# Altium PCB SM_ME0005V2.6_20161210.PcbDoc (part 2 of 3)
Units mil, origin at the board's own origin, x right, y up, seen from the top; angles counter-clockwise.
Board outline 2285 x 3470 mil, 2 copper layers (Top Layer, Bottom Layer); 87 components, 70 nets, 269 pads, 297 vias.
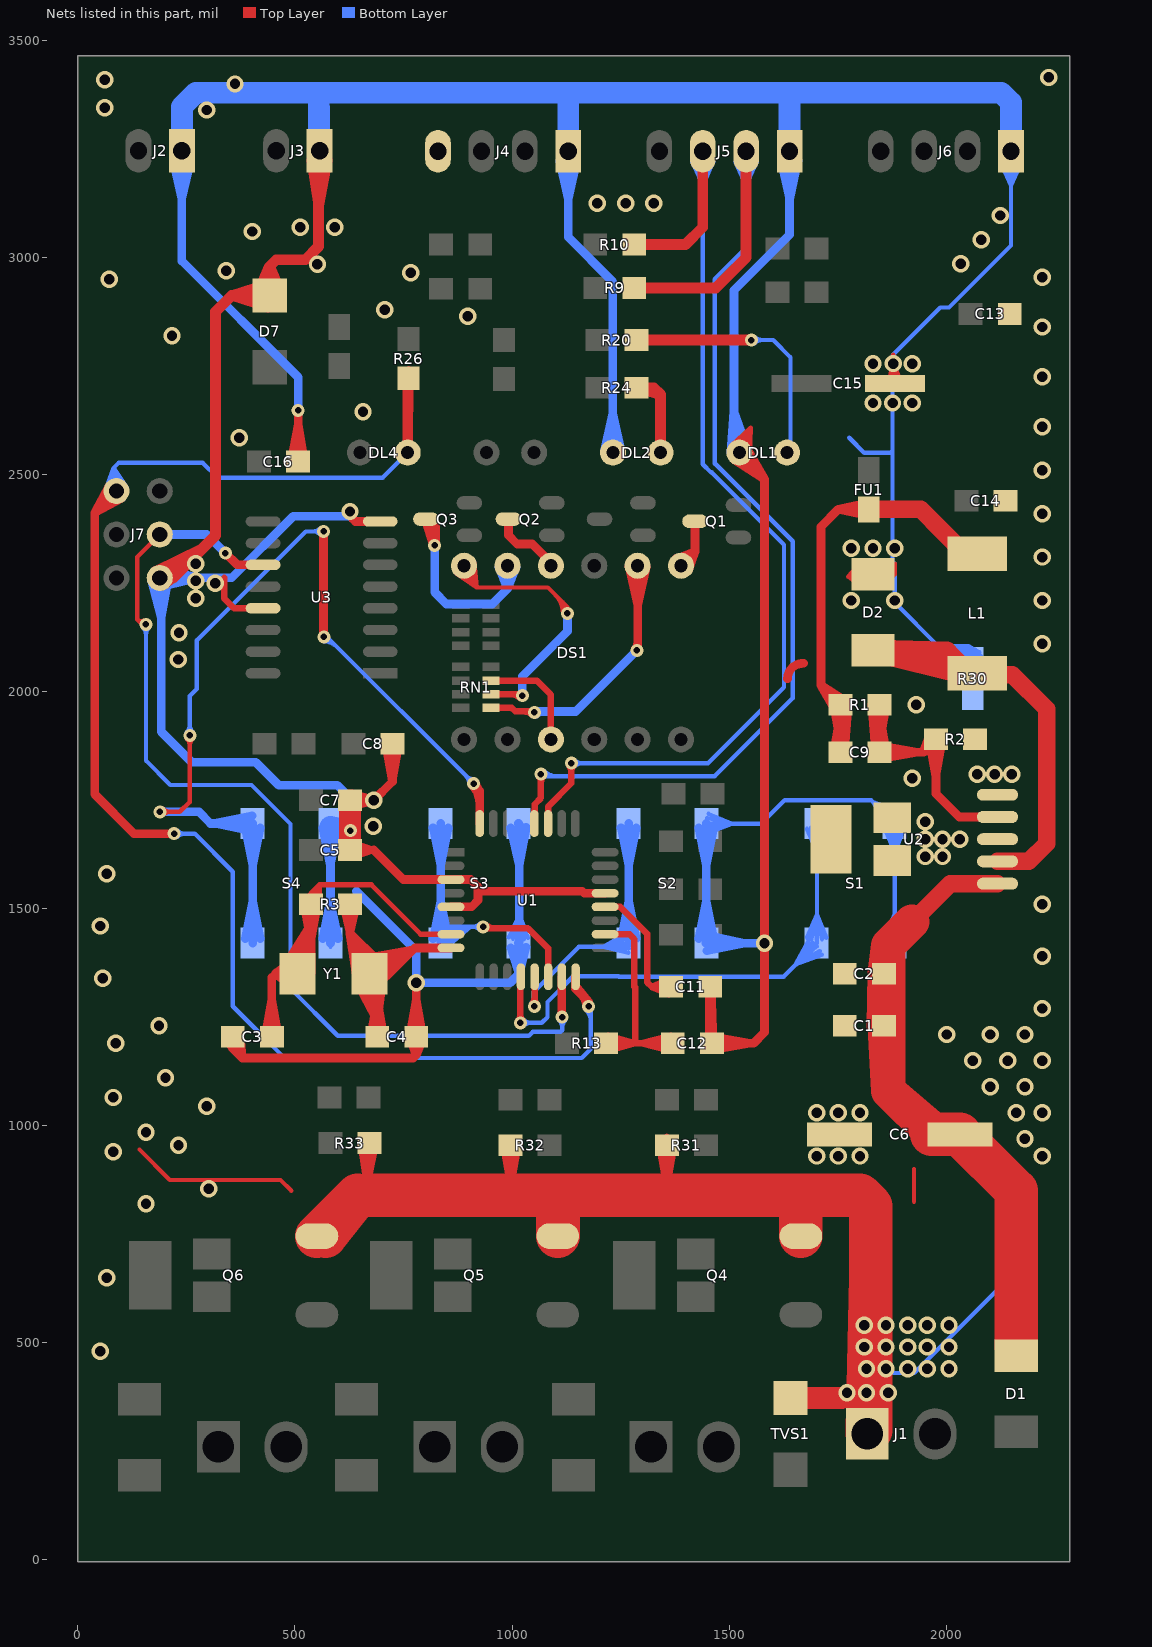
[diagram p2: the nets of this part, all layers, seen from the top]

## Via types
v1: diameter 40, hole 24, Top Layer to Bottom Layer, 247 vias
v2: diameter 30, hole 15, Top Layer to Bottom Layer, 50 vias

## Nets (pads, with @x,y where several pads share a name; then routed paths per layer and width w, separated by ;. In a path a pad name is that pad's centre, name@x,y a point inside that pad or via, vN(x,y) a via of type N, cw(c..) or ccw(c..) an arc to the next point about the centre after c; other vN are vias at no path point) (continued)
GND: C3.1 C4.1 C5.1 C7.1 C8.1 C11.2 C12.1 C13.2 C14.2 C15.2 C16.1 D2.A D7.1 DL1.K DL2.K J2.1 J3.1 J4.1 J4.4 J5.1 J6.1 J7.6 R30.2@2061.73,2074.57 S1.1 S2.1 S3.1 S4.1 U1.3 U1.5 U1.21 U3.8 U3.13 | length 27880.1
  Top Layer w10: U3.13@423.49,2194.57 U3.13@426.49,2191.57 ; v2@497.49,2647.57 v2@506.73,2638.32 ; 1161.73,1539.57 1166.22,1535.08 ; C12.1@1445.4,1189.57 C12.1@1460.4,1189.57 ; DL1.K@1503.47,2564.83 1549.73,2607.57 ; DL1.K@1510.91,2557.97 1549.73,2607.57 ; DL1.K@1519.8,2550.2 1519.8,2577.64 1549.73,2607.57 ; DL1.K@1523.74,2550.2 1549.73,2607.57 ; DL1.K@1538.04,2545.68 1549.73,2607.57 ; DL1.K@1548.1,2544.6 1549.73,2607.57 ; C15.2@1827.49,2709.57 C15.2@1877.98,2709.57 ; C15.2@1867.62,2710.47 v1@1877.98,2759.48 ; C15.2@1867.62,2710.55 v1(1877.98,2755.38) ; 1877.98,2775.82 C15.2@1877.98,2709.57 ; 1881.73,2294.57 1881.73,2269.57 D2.A@1876.73,2264.57 ; C15.2@1896.49,2713.25 v1(1877.98,2755.38) ; C15.2@1896.56,2712.95 v1@1877.98,2759.48 ; 1774.49,2264.57 1819.23,2269.57 1774.49,2264.57 ; 1774.49,2264.57 1816.13,2281.68 1774.49,2264.57 ; 1774.49,2264.57 1818.88,2257.07 1774.49,2264.57 ; 1774.49,2264.57 1811.23,2290.59 1774.49,2264.57 ; 1774.49,2264.57 1816.06,2247.29 1774.49,2264.57 ; 1774.49,2264.57 1804.21,2298.39 1774.49,2264.57 ; 1774.49,2264.57 1810.94,2238.14 1774.49,2264.57 ; 1774.49,2264.57 D2.A@1876.73,2264.57 ; 1774.49,2264.57 D2.A@1876.73,2264.57 ; C15.2@1877.98,2709.57 v1(1877.98,2755.38) ; v1(1877.98,2755.38) C15.2@1882.28,2709.57 v1@1877.98,2759.48
  Top Layer w15: 336.73,2261.57 336.73,2214.57 359.73,2191.57 ; U3.13@398.49,2191.57 359.73,2191.57 ; U3.13@426.49,2191.57 359.73,2191.57 ; C5.1@626.73,1634.57 681.73,1634.57 ; C5.1@629.23,1634.57 681.73,1634.57 ; C5.1@632.15,1617.31 681.73,1634.57 ; C5.1@632.15,1651.82 681.73,1634.57
  Top Layer w20: C3.1@346.2,1197.15 378.49,1155.57 ; C3.1@359.23,1204.57 378.49,1155.57 ; C3.1@373.83,1208.01 378.49,1155.57 ; C16.1@491.8,2531.02 507.49,2614.57 ; v2(507.49,2647.57) 507.49,2530.32 C16.1@506.73,2529.57 507.49,2614.57 ; C16.1@521.68,2530.76 507.49,2614.57 ; C5.1@626.73,1634.57 C5.1@631.73,1629.57 ; C7.1@626.73,1749.57 v1(681.73,1749.57) ; C7.1@629.23,1749.57 v1(681.73,1749.57) ; C7.1@631.37,1734.72 v1(681.73,1749.57) ; C7.1@631.37,1764.41 v1(681.73,1749.57) ; v1@631.99,2399.07 639.49,2391.57 ; U3.8@668.49,2391.57 639.49,2391.57 ; 681.73,1634.57 749.72,1566.57 U1.3@859.49,1566.57 904.72,1566.57 ; U3.8@696.49,2391.57 639.49,2391.57 ; C8.1@709.55,1878.24 724.49,1794.57 C8.1@739.43,1878.24 ; C8.1@724.49,1879.57 724.49,1792.32 v1(681.73,1749.57) ; C4.1@764.55,1205.4 779.49,1289.08 C4.1@794.43,1205.4 ; C4.1@764.73,1201.39 779.49,1162.32 ; 768.49,1566.57 U1.3@838.33,1566.57 ; v1(779.49,1328.57) C4.1@779.49,1204.08 779.49,1162.32 ; C4.1@794.24,1201.39 779.49,1162.32 ; U1.5@859.49,1503.58 906.73,1503.58 ; U1.5@880.65,1503.58 906.73,1503.58 ; U1.3@880.65,1566.57 904.72,1566.57 ; 1161.73,1539.57 921.73,1539.57 ; U1.21@1193.33,1535.08 1166.22,1535.08 U1.21@1214.49,1535.08 ; C12.1@1460.4,1189.57 1556.73,1189.57 1581.73,1214.57 v1(1581.73,1419.57) 1581.73,2488.27 ; C12.1@1462.9,1189.57 1547.9,1189.57 ; C12.1@1464.22,1174.62 1547.9,1189.57 ; C12.1@1464.22,1204.51 1547.9,1189.57 ; 1634.73,2029.57 cw(c1670.73,2028.57) 1671.73,2064.57 ; 356.73,1177.32 C3.1@356.73,1204.57 ; 356.73,1177.32 342.31,1200.44 356.73,1177.32 ; 356.73,1177.32 371.15,1200.44 356.73,1177.32 ; 356.73,1177.32 C3.1@356.73,1204.57 ; 356.73,1177.32 C3.1@356.73,1204.57 ; 356.73,1177.32 378.49,1155.57 ; 378.49,1155.57 772.73,1155.57 779.49,1162.32 ; 904.72,1566.57 921.73,1549.57 921.73,1539.57 ; 906.73,1503.58 921.73,1518.58 921.73,1539.57 ; 1581.73,2488.27 DL1.K@1523.74,2550.2 1581.73,2488.27 ; 1581.73,2488.27 1510.85,2534.9 1581.73,2488.27 ; 1581.73,2488.27 1539.85,2562.05 1581.73,2488.27 ; 1581.73,2488.27 1519.8,2550.2 1581.73,2488.27
  Top Layer w25: J7.6@179.66,2276.68 285.53,2328.36 ; J7.6@199.45,2247.93 285.53,2328.36 ; D7.1@415.4,2917.61 441.73,2979.57 ; D7.1@437.6,2885.69 354.41,2912.24 ; D7.1@437.6,2938.79 354.41,2912.24 ; D7.1@468.06,2917.61 441.73,2979.57 ; J3.1@539.27,3224.48 554.49,3120.54 ; J3.1@554.49,3254.57 554.49,3025 524.05,2994.57 456.73,2994.57 441.73,2979.57 ; J3.1@556.73,3225.57 554.49,3120.54 ; J3.1@574.14,3223.74 554.49,3120.54 ; 1459.3,1219.55 C11.2@1456.73,1319.57 ; J7.6@188.49,2261.57 218.73,2261.57 ; J7.6@188.49,2261.57 285.53,2328.36 ; J7.6@188.49,2261.57 218.73,2261.57 ; 218.73,2261.57 193.55,2244.81 218.73,2261.57 ; 218.73,2261.57 193.55,2278.32 218.73,2261.57 ; 218.73,2261.57 316.73,2359.57 316.73,2874.57 354.41,2912.24 ; 354.41,2912.24 D7.1@441.73,2912.24 ; 354.41,2912.24 D7.1@441.73,2912.24 ; D7.1@441.73,2912.24 441.73,2979.57 ; C11.2@1456.73,1319.57 1456.73,1289.77 C12.1@1460.4,1189.57 1456.73,1193.23 C11.2@1456.73,1319.57
  Top Layer w50: C5.1@626.73,1634.57 C7.1@626.73,1749.57
  Bottom Layer w10: v2@497.49,2647.57 v2@506.73,2656.81 ; S4.1@581.73,1411.57 S4.1@581.73,1419.57 ; S3.1@992.81,1433.32 1016.73,1485.74 ; S3.1@992.8,1682.82 1016.73,1630.39 ; S3.1@1002.33,1429.94 1016.73,1485.74 ; S3.1@1002.33,1686.2 1016.73,1630.39 ; S3.1@1014.76,1428.15 1016.73,1485.74 ; S3.1@1014.76,1687.99 1016.73,1630.39 ; S3.1@1016.73,1422.24 1016.73,1409.57 S3.1@1016.73,1695.16 ; S3.1@1027.29,1429.09 1016.73,1485.74 ; S3.1@1027.29,1687.05 1016.73,1630.39 ; S3.1@1037.02,1431.81 1016.73,1485.74 ; S3.1@1037.02,1684.34 1016.73,1630.39 ; 1126.73,3379.57 1129.49,3376.81 1129.49,3369.57 ; 1232.4,3369.57 1232.4,3375.23 1236.73,3379.57 ; S2.1@1446.73,1419.57 S2.1@1446.73,1420.27 ; S2.1@1446.73,1695.16 1447.83,1695.16 1573.89,1695.16 1628.3,1749.57 1827.32,1749.57 1881.73,1695.16 S1.1@1881.73,1419.57 ; S2.1@1447.83,1695.87 1505.4,1695.16 ; S2.1@1449.05,1683.37 1505.4,1695.16 ; S2.1@1449.36,1708.33 1505.4,1695.16 ; S2.1@1451.98,1673.69 1505.4,1695.16 ; S2.1@1452.53,1717.93 1505.4,1695.16 ; 1776.73,2584.57 1811.73,2549.57 1871.73,2549.57 1876.73,2554.57 ; S1.1@1858.85,1432.88 1881.73,1485.71 ; S1.1@1858.85,1683.26 1881.73,1630.43 ; S1.1@1863.56,1689.32 1832.16,1744.73 ; S1.1@1868.44,1429.7 1881.73,1485.71 ; S1.1@1868.44,1686.44 1881.73,1630.43 ; S1.1@1871.91,1694.97 1832.16,1744.73 ; S1.1@1880.91,1428.15 1881.73,1485.71 ; S1.1@1880.91,1687.99 1881.73,1630.43 ; S1.1@1880.91,1703.74 1832.16,1744.73 ; S1.1@1888,1714.1 1832.16,1744.73 ; S1.1@1892.14,1723.3 1832.16,1744.73 ; S1.1@1893.41,1429.34 1881.73,1485.71 ; S1.1@1893.41,1686.8 1881.73,1630.43 ; S1.1@1903.09,1432.25 1881.73,1485.71 ; S1.1@1903.09,1683.89 1881.73,1630.43 ; R30.2@2051.07,2060.14 1999.32,2104.57 ; R30.2@2057.04,2068.24 1999.32,2104.57 ; R30.2@2058.13,2052.39 2101.73,2054.57 ; R30.2@2058.8,2062.51 2101.73,2054.57 ; R30.2@2061.73,2072.07 2101.73,2054.57 ; R30.2@2065.08,2086.49 1999.32,2104.57 ; R30.2@2066.76,2080.71 2101.73,2054.57 ; R30.2@2067.03,2096.35 1999.32,2104.57 ; R30.2@2073.73,2088.07 2101.73,2054.57 ; J6.1@2125.49,3219.83 2149.49,3165.35 ; J6.1@2135.07,3223.11 2149.49,3165.35 ; J6.1@2149.49,3224.88 2149.49,3165.35 ; J6.1@2149.49,3244.57 2149.49,3027.32 2006.73,2884.57 1986.73,2884.57 1876.73,2774.57 1876.73,2554.57 ; J6.1@2163.91,3223.11 2149.49,3165.35 ; J6.1@2173.49,3219.83 2149.49,3165.35 ; 1876.73,2554.57 1876.73,2299.57 1881.73,2294.57 1881.73,2204.57 1981.73,2104.57 2051.73,2104.57 ; 1999.32,2104.57 R30.2@2061.73,2077.07 ; 2051.73,2104.57 R30.2@2061.73,2077.07 ; 2051.73,2104.57 2070.41,2082.04 2051.73,2104.57 ; 2051.73,2104.57 2051.89,2075.3 2051.73,2104.57 ; 2051.73,2104.57 2077.06,2089.91 2051.73,2104.57 ; 2051.73,2104.57 2041.73,2077.07 2051.73,2104.57 ; 2051.73,2104.57 R30.2@2061.73,2077.07 ; 2051.73,2104.57 2101.73,2054.57 ; 2099.01,2057.29 ccw(c2104.69,2062.96) 2106.67,2055.18 cw(c2104.69,2062.96) 2099.01,2057.29
  Bottom Layer w20: J7.6@168.7,2258.64 191.73,2171.4 ; J7.6@190.71,2241.69 278.49,2261.57 J7.6@190.71,2281.44 ; J7.6@208.43,2260.07 191.73,2171.4 ; J2.1@219.61,3223.34 239.49,3135.57 ; J2.1@239.49,3225.57 239.49,3135.57 ; J2.1@239.49,3254.57 239.49,2991.81 507.49,2723.81 v2(507.49,2647.57) ; J2.1@259.36,3223.34 239.49,3135.57 ; S4.1@564.22,1429.92 581.73,1515.71 ; S4.1@564.22,1686.22 581.73,1600.43 ; S4.1@581.69,1428.15 581.73,1515.71 ; S4.1@581.69,1687.99 581.73,1600.43 ; S4.1@581.73,1419.57 S4.1@581.73,1679.57 ; S4.1@599.16,1429.9 581.73,1515.71 ; S4.1@599.16,1686.24 581.73,1600.43 ; v2@623.95,1683.1 ccw(c593.1,1713.95) 636.73,1713.95 ; v2@631.73,1684.57 636.73,1689.57 636.73,1744.57 597.73,1783.57 462.73,1783.57 409.73,1836.57 262.23,1836.57 191.73,1907.07 191.73,2258.32 J7.6@188.49,2261.57 ; v1@631.99,2399.07 627.49,2403.57 495.73,2403.57 353.73,2261.57 336.73,2261.57 J7.6@188.49,2261.57 ; 641.73,1539.57 779.49,1401.81 v1(779.49,1328.57) 995.73,1328.57 1016.73,1349.57 ; S3.1@997.34,1685.84 1016.73,1600.39 ; S3.1@997.46,1409.4 1016.73,1349.57 ; S3.1@1014.76,1412.4 1016.73,1349.57 ; S3.1@1014.76,1420.27 1016.73,1422.24 1016.73,1693.9 S3.1@1014.76,1695.87 ; S3.1@1014.76,1687.99 1016.73,1600.39 ; S3.1@1016.73,1409.57 1016.73,1349.57 ; S3.1@1032.22,1410.49 1016.73,1349.57 ; S3.1@1032.27,1686.63 1016.73,1600.39 ; J4.1@1110.08,3222.75 1129.49,3135.35 ; J4.1@1129.49,3224.88 1129.49,3135.35 ; J4.1@1129.49,3244.57 1129.49,3046.81 1232.4,2943.9 DL2.K@1232.4,2550.2 ; J4.1@1148.9,3222.75 1129.49,3135.35 ; DL2.K@1212.52,2552.42 1232.4,2640.2 DL2.K@1252.28,2552.42 ; S2.1@1430.36,1429.91 1447.83,1515.71 ; S2.1@1430.36,1686.23 1447.83,1600.43 ; S2.1@1446.73,1419.57 v1(1581.73,1419.57) ; S2.1@1447.83,1428.15 1447.83,1515.71 ; S2.1@1447.83,1687.99 1447.83,1600.43 ; S2.1@1447.83,1695.87 1447.83,1695.16 S2.1@1447.83,1420.27 1535.4,1419.57 ; S2.1@1449.45,1402.79 1535.4,1419.57 ; S2.1@1449.74,1437.73 1535.4,1419.57 ; S2.1@1465.3,1429.91 1447.83,1515.71 ; S2.1@1465.3,1686.23 1447.83,1600.43 ; DL1.K@1503.74,2549.73 1511.55,2644.59 ; DL1.K@1506.73,2563.27 DL1.K@1519.8,2550.2 ; DL1.K@1511.55,2568.08 1511.55,2924.38 1639.49,3052.32 J5.1@1639.49,3244.57 ; DL1.K@1523.74,2550.2 1511.55,2644.59 ; DL1.K@1543.19,2554.83 1511.55,2644.59 ; J5.1@1620.08,3222.75 1639.49,3135.35 ; J5.1@1639.49,3224.88 1639.49,3135.35 ; J5.1@1658.9,3222.75 1639.49,3135.35 ; J7.6@188.49,2261.57 191.73,2171.4
  Bottom Layer w50: J2.1@239.49,3254.57 239.49,3347.32 ; J2.1@239.49,3265.57 239.49,3347.32 ; J3.1@554.49,3254.57 554.49,3377.32 ; J3.1@556.73,3265.57 554.49,3377.32 ; S4.1@581.69,1687.99 v2(627.49,1679.57) S4.1@597.32,1679.57 ; J4.1@1129.49,3244.57 1129.49,3369.57 J4.1@1129.49,3264.25 ; J5.1@1639.49,3244.57 1639.49,3372.32 ; J5.1@1639.49,3264.25 1639.49,3372.32 ; J6.1@2149.49,3244.57 2149.49,3357.32 ; J6.1@2149.49,3264.25 2149.49,3357.32 ; 239.49,3347.32 271.73,3379.57 556.73,3379.57 ; 554.49,3377.32 556.73,3379.57 ; 556.73,3379.57 1126.73,3379.57 1236.73,3379.57 1646.73,3379.57 ; 1639.49,3372.32 1646.73,3379.57 ; 1646.73,3379.57 2127.24,3379.57 2149.49,3357.32
  other v1: 680.73,1689.57 230.73,2073.57 2221.73,2109.57 232.73,2135.57 1781.73,2209.57 1881.73,2209.57 2221.73,2209.57 271.73,2214.57 316.73,2249.57 271.73,2254.57 271.73,2294.57 2221.73,2309.57 1781.73,2329.57 1831.73,2329.57 1881.73,2329.57 2221.73,2409.57 626.73,2414.57 2221.73,2509.57 371.73,2584.57 2221.73,2609.57 656.73,2644.57 1831.73,2664.57 1876.73,2664.57 1921.73,2664.57 2221.73,2724.57 1831.73,2754.57 1921.73,2754.57 216.73,2819.57 2221.73,2839.57 897.73,2864.57 706.73,2879.57 71.73,2949.57 2221.73,2954.57 766.73,2964.57 341.73,2969.57 551.73,2984.57 2033.73,2985.57 2080.73,3040.57 401.73,3059.57 511.73,3069.57 591.73,3069.57 2124.73,3096.57 1196.73,3124.57 1261.73,3124.57 1326.73,3124.57 296.73,3339.57 61.73,3344.57 361.73,3399.57 61.73,3409.57 2236.73,3414.57
GND1: C1.2 C2.2 C6.2 J1.1 Q4.3 Q5.3 Q6.3 R2.1 R30.1@2061.73,1984.57 R31.1 R32.1 R33.1 TVS1.1 U2.3 U2.5 | length 8555.9
  Top Layer w10: 141.73,944.57 211.73,874.57 ; 491.73,849.57 466.73,874.57 ; 666.73,839.57 666.73,861.3 ; R31.1@1356.73,959.57 R31.1@1356.73,976.81 ; 1665.55,833.38 1671.73,839.57 ; 1926.19,824.57 1926.19,899.57 ; 211.73,874.57 301.73,874.57 466.73,874.57 ; 211.73,874.57 466.73,874.57
  Top Layer w20: 645,839.57 666.73,861.3 ; R32.1@981.79,953.24 996.73,869.57 ; R32.1@996.73,954.57 996.73,869.57 ; R32.1@996.73,959.57 996.73,844.57 1001.73,839.57 ; R32.1@1011.67,953.24 996.73,869.57 ; 1341.73,839.57 1356.73,854.57 R31.1@1356.73,959.57 ; R31.1@1341.79,953.24 1356.73,869.57 ; R31.1@1356.73,954.57 1356.73,869.57 ; R31.1@1371.67,953.24 1356.73,869.57 ; 666.73,861.3 666.73,959.57 666.73,861.3 ; 666.73,874.29 669.23,959.57 666.73,874.29 ; 666.73,874.29 654.26,958.69 666.73,874.29 ; 666.73,874.29 684.13,957.81 666.73,874.29
  Top Layer w50: TVS1.1@1641.73,372.24 1759.41,372.24 TVS1.1@1651.73,372.24
  Top Layer w100: Q6.3@550.55,745.12 645,839.57 Q6.3@570.24,745.12 ; 666.73,839.57 1001.73,839.57 1106.73,839.57 ; Q4.3@1665.55,745.12 1665.55,833.38 ; J1.1@1818.58,289.57 J1.1@1826.73,297.72 ; 1826.73,649.13 J1.1@1818.58,299.41 ; 1106.73,839.57 Q5.3@1105.55,745.12 1106.73,746.3 1106.73,839.57 ; 1106.73,839.57 1341.73,839.57 1671.73,839.57 1801.73,839.57 1826.73,814.57 ; J1.1@1818.58,299.41 v1@1826.73,384.57 ; J1.1@1818.58,299.41 v1@1826.73,384.57 ; J1.1@1818.58,299.41 v1@1826.73,439.57 ; J1.1@1826.73,297.72 v1@1826.73,384.57 ; J1.1@1826.73,297.72 1826.73,814.57 ; v1@1826.73,384.57 v1@1826.73,439.57 ; v1@1826.73,439.57 1826.73,489.57 1826.73,539.57 1826.73,749.57 1826.73,814.57
  Bottom Layer w10: v1@1818.58,378.62 1818.58,299.41 v1@1818.58,378.62 ; v1@1818.58,378.62 1832.74,300.68 v1@1818.58,378.62 ; v1@1818.58,378.62 1804.43,300.68 v1@1818.58,378.62 ; v1@1818.58,378.62 1842.51,303.11 v1@1818.58,378.62 ; v1@1818.58,378.62 1794.65,303.11 v1@1818.58,378.62 ; v1@1818.58,378.62 1851.99,306.8 v1@1818.58,378.62 ; v1@1818.58,378.62 1785.18,306.8 v1@1818.58,378.62 ; v1@1818.58,378.62 1861.04,311.75 v1@1818.58,378.62 ; v1@1818.58,378.62 1776.13,311.75 v1@1818.58,378.62 ; v1@1818.58,429.57 1818.58,384.57 J1.1@1818.58,289.57 v1@1818.58,429.57 ; v1@1818.58,429.57 1861.73,429.57 1911.73,429.57 v1@1926.73,429.57 ; v1@1818.58,429.57 v1@1926.73,429.57 ; v1@1926.73,429.57 1946.73,449.57 1971.73,474.57 1996.73,499.57 2021.73,524.57 2186.73,689.57 v1@1926.73,429.57
  other v1: 1771.73,384.57 1816.73,384.57 1866.73,384.57 1816.73,439.57 1861.73,439.57 1911.73,439.57 1956.73,439.57 2006.73,439.57 51.73,479.57 1811.73,489.57 1861.73,489.57 1911.73,489.57 1956.73,489.57 2006.73,489.57 1811.73,539.57 1861.73,539.57 1911.73,539.57 1956.73,539.57 2006.73,539.57 66.73,649.57 156.73,819.57 301.73,854.57 1701.73,929.57 1751.73,929.57 1801.73,929.57 2221.73,929.57 81.73,939.57 231.73,954.57 2181.73,969.57 156.73,984.57 1701.73,1029.57 1751.73,1029.57 1801.73,1029.57 2161.73,1029.57 2221.73,1029.57 296.73,1044.57 81.73,1064.57 2101.73,1089.57 2181.73,1089.57 201.73,1109.57 2061.73,1149.57 2141.73,1149.57 2221.73,1149.57 86.73,1189.57 2001.73,1209.57 2101.73,1209.57 2181.73,1209.57 186.73,1229.57 2221.73,1269.57 56.73,1339.57 2221.73,1389.57 51.73,1459.57 2221.73,1509.57 66.73,1579.57 1951.73,1619.57 1991.73,1619.57 1951.73,1659.57 1991.73,1659.57 2031.73,1659.57 1951.73,1699.57 1921.73,1799.57 2071.73,1809.57 2111.73,1809.57 2151.73,1809.57 1931.73,1969.57
IIC_SCL: J5.2 R9.1 U1.28 | length 3156.3
  Top Layer w15: U1.28@1051.52,1695.61 1052.49,1696.58 1052.49,1740.32 ; U1.28@1051.52,1716.77 1052.49,1740.32 ; v2@1061.43,1804.26 cw(c1048.63,1791.46) 1066.73,1791.46 cw(c1084.84,1791.46) v2@1072.04,1804.26 ; v2(1066.73,1809.57) 1066.73,1754.57 1052.49,1740.32
  Top Layer w25: R9.1@1281.73,2929.57 1469.49,2929.57 1539.49,2999.57 J5.2@1539.49,3244.57 ; R9.1@1284.23,2929.57 1384.23,2929.57
  Bottom Layer w10: v2(1066.73,1809.57) 1071.73,1804.57 1466.73,1804.57 1646.73,1984.57 1646.73,2346.13 1468.3,2524.57 1466.73,2524.57 1466.73,2949.92 1539.49,3022.68 J5.2@1539.49,3244.57 ; v2@1073.8,1816.64 ccw(c1102.95,1845.78) 1102.95,1804.57 ; J5.2@1515.49,3219.83 1539.49,3165.35 ; J5.2@1525.07,3223.11 1539.49,3165.35 ; J5.2@1539.49,3224.88 1539.49,3165.35 ; J5.2@1553.91,3223.11 1539.49,3165.35 ; J5.2@1563.49,3219.83 1539.49,3165.35
IIC_SDA: J5.3 R10.1 U1.27 | length 2868.3
  Top Layer w15: U1.27@1083.02,1695.61 1083.02,1734.57 ; U1.27@1083.02,1716.77 1083.02,1734.57 ; v2@1131.43,1829.26 cw(c1118.63,1816.46) 1136.73,1816.46 cw(c1154.84,1816.46) v2@1142.04,1829.26 ; v2(1136.73,1834.57) 1136.73,1788.28 1083.02,1734.57
  Top Layer w25: R10.1@1281.73,3029.57 1399.49,3029.57 1439.49,3069.57 J5.3@1439.49,3244.57 ; R10.1@1284.23,3029.57 1384.23,3029.57
  Bottom Layer w10: v2(1136.73,1834.57) 1451.73,1834.57 1626.73,2009.57 1626.73,2337.85 1460.02,2504.57 1458.45,2504.57 1439.49,2523.53 J5.3@1439.49,3244.57 ; v2@1143.8,1827.49 cw(c1160.87,1810.42) 1160.87,1834.57 cw(c1160.87,1858.71) v2@1143.8,1841.64 ; J5.3@1415.49,3219.83 1439.49,3165.35 ; J5.3@1425.07,3223.11 1439.49,3165.35 ; J5.3@1439.49,3224.88 1439.49,3165.35 ; J5.3@1453.91,3223.11 1439.49,3165.35 ; J5.3@1463.49,3219.83 1439.49,3165.35
KEY1: S1.2 U1.12 | length 3408.3
  Top Layer w10: v2@1021.99,1239.07 1024.49,1236.57 v2@1021.99,1239.07
  Top Layer w15: v2@1014.18,1241.87 ccw(c1002,1254.05) 1019.23,1254.05 ; 1019.23,1255.29 ccw(c1038.21,1255.29) v2@1024.79,1241.87 ; U1.12@1020.49,1342.57 1019.23,1341.31 v2@1019.23,1241.82 ; v2@1019.23,1241.82 1021.99,1239.07 v2@1019.23,1241.82
  Bottom Layer w10: v2@1024.49,1236.57 1068.73,1236.57 1081.73,1249.57 1081.73,1284.57 1140.95,1343.79 1245.79,1343.79 1246.64,1342.93 1625.96,1342.93 ; v2@1026.56,1229.49 cw(c1043.63,1212.42) 1043.63,1236.57 cw(c1043.63,1260.71) v2@1026.56,1243.64 ; 1625.96,1342.93 1702.54,1419.51 S1.2@1702.6,1419.57 ; 1625.96,1342.93 S1.2@1702.6,1419.57 ; 1653.48,1370.45 1701.77,1412.4 1653.48,1370.45 ; 1653.48,1370.45 1692.64,1421.03 1653.48,1370.45 ; 1653.48,1370.45 1709.04,1402.16 1653.48,1370.45 ; 1653.48,1370.45 1684.21,1426.55 1653.48,1370.45 ; 1653.48,1370.45 1713.33,1393.03 1653.48,1370.45 ; S1.2@1702.6,1419.57 1702.6,1420.27 1702.6,1695.16 S1.2@1702.6,1419.57 ; 1702.6,1485.71 1701.77,1428.15 1702.6,1485.71 ; 1702.6,1485.71 1714.27,1429.34 1702.6,1485.71 ; 1702.6,1485.71 1689.31,1429.7 1702.6,1485.71 ; 1702.6,1485.71 1723.95,1432.25 1702.6,1485.71 ; 1702.6,1485.71 1679.72,1432.88 1702.6,1485.71 ; 1702.6,1630.43 1701.77,1687.99 1702.6,1630.43 ; 1702.6,1630.43 1689.31,1686.44 1702.6,1630.43 ; 1702.6,1630.43 1714.27,1686.8 1702.6,1630.43 ; 1702.6,1630.43 1679.72,1683.26 1702.6,1630.43 ; 1702.6,1630.43 1723.95,1683.89 1702.6,1630.43
  other v2: 1019.49,1236.57
KEY2: S2.2 U1.13 | length 1597.4
  Top Layer w10: U1.13@1050.49,1341.07 U1.13@1051.98,1342.57 ; v2(1051.73,1274.57) v2@1051.98,1274.82
  Top Layer w15: U1.13@1051.98,1321.41 1051.98,1274.82 U1.13@1051.98,1342.57 ; v2@1046.43,1279.87 ccw(c1033.02,1293.28) 1051.98,1293.28 cw(c1033.02,1293.28) v2@1046.43,1279.87 ; 1051.98,1292.06 ccw(c1069.23,1292.06) 1057.04,1279.87 cw(c1069.23,1292.06) 1051.98,1292.06
  Bottom Layer w10: v2@1044.66,1281.64 ccw(c1030.59,1295.7) 1050.49,1295.7 ; 1050.49,1301.71 ccw(c1078.88,1301.71) v2@1058.8,1281.64 ; v2@1051.73,1284.57 1050.49,1285.81 1050.49,1308.32 1154.07,1411.9 1259.94,1411.9 S2.2@1267.6,1419.57 ; S2.2@1261.31,1441.59 1210.09,1411.9 ; S2.2@1265.62,1432.45 1210.09,1411.9 ; S2.2@1267.58,1397.74 1210.09,1411.9 ; S2.2@1268.7,1420.27 1210.09,1411.9 ; S2.2@1269.15,1407.72 1210.09,1411.9 ; S2.2@1267.6,1419.57 1267.6,1420.27 S2.2@1267.6,1419.57
  Bottom Layer w20: S2.2@1251.23,1429.91 1268.7,1515.71 ; S2.2@1251.23,1686.23 1268.7,1600.43 ; S2.2@1268.7,1420.27 S2.2@1268.7,1695.87 ; S2.2@1268.7,1428.15 1268.7,1515.71 ; S2.2@1268.7,1687.99 1268.7,1600.43 ; S2.2@1286.17,1429.91 1268.7,1515.71 ; S2.2@1286.17,1686.23 1268.7,1600.43
KEY3: S3.2 U1.14 | length 2715.4
  Top Layer w15: v2@936.49,1454.57 1036.73,1454.57 1083.48,1407.82 ; v2@938.79,1462.87 ccw(c958.84,1482.92) 958.84,1454.57 ; U1.14@1083.48,1342.57 1083.48,1407.82 ; U1.14@1083.48,1363.72 1083.48,1407.82
  Bottom Layer w10: S3.2@813.67,1433.32 837.6,1485.75 ; S3.2@813.67,1682.82 837.6,1630.39 ; S3.2@823.2,1429.94 837.6,1485.75 ; S3.2@823.2,1686.2 837.6,1630.39 ; S3.2@829.96,1449.98 904.06,1457.57 ; S3.2@831.66,1440.06 904.06,1457.57 ; S3.2@835.63,1687.99 837.6,1630.39 ; S3.2@837.6,1695.16 837.6,1457.57 ; S3.2@841.54,1417.07 904.06,1457.57 ; S3.2@847.57,1409.01 904.06,1457.57 ; S3.2@848.15,1429.09 837.6,1485.75 ; S3.2@848.15,1687.05 837.6,1630.39 ; S3.2@857.89,1431.81 837.6,1485.75 ; S3.2@857.89,1684.33 837.6,1630.39 ; v2@926.42,1450.49 ccw(c909.35,1433.42) 909.35,1457.57 ccw(c909.35,1481.71) v2@926.42,1464.64 ; v2(933.49,1457.57) 837.6,1457.57 ; S3.2@835.63,1428.15 837.6,1457.57 ; S3.2@835.63,1428.15 904.06,1457.57 ; S3.2@835.63,1428.15 837.6,1457.57 ; S3.2@835.63,1428.15 837.6,1485.75 ; 837.6,1457.57 848.05,1430 837.6,1457.57 ; 837.6,1457.57 823.57,1431.64 837.6,1457.57 ; 837.6,1457.57 857,1435.37 837.6,1457.57 ; 837.6,1457.57 815.41,1438.15 837.6,1457.57 ; S3.2@837.6,1419.57 837.6,1420.27 S3.2@837.6,1419.57
  Bottom Layer w20: S3.2@818.16,1429.91 835.63,1515.71 ; S3.2@818.16,1686.23 835.63,1600.43 ; S3.2@835.63,1420.27 S3.2@835.63,1695.87 ; S3.2@835.63,1428.15 835.63,1515.71 ; S3.2@835.63,1687.99 835.63,1600.43 ; S3.2@853.1,1429.91 835.63,1515.71 ; S3.2@853.1,1686.23 835.63,1600.43
KEY4: S4.2 U1.32 | length 3390.8
  Top Layer w10: v2(188.73,1722.57) 234.73,1722.57 256.73,1744.57 257.73,1744.57 v2(257.73,1898.57) ; v2@195.8,1715.49 cw(c212.87,1698.42) 212.87,1722.57 cw(c212.87,1746.71) v2@195.8,1729.64 ; v2@250.66,1891.49 cw(c233.59,1874.42) 257.73,1874.42 cw(c281.87,1874.42) v2@264.8,1891.49 ; v2(565.73,2368.57) v2@566.73,2367.57
  Top Layer w20: v2(565.73,2368.57) 565.73,2126.57 v2(566.73,2125.57) ; v2@911.73,1784.57 925.54,1770.76 ; v2@916.73,1787.57 ccw(c936.05,1787.57) 922.39,1773.91 ; U1.32@925.54,1695.61 925.54,1770.76 ; U1.32@925.54,1716.77 925.54,1770.76 ; v2@908.2,1784.03 cw(c866.34,1742.17) 925.54,1742.17 ccw(c866.34,1742.17) v2@908.2,1784.03 ; v2@911.01,1782.62 cw(c908.56,1765.82) 925.54,1765.82 ccw(c908.56,1765.82) v2@911.01,1782.62
  Bottom Layer w10: v2@250.66,1905.64 ccw(c233.59,1922.71) 257.73,1922.71 ccw(c281.87,1922.71) v2@264.8,1905.64 ; v2(257.73,1898.57) 257.73,1989.57 273.73,2005.57 273.73,2117.52 524.78,2368.57 v2(565.73,2368.57) ; v2@558.66,2361.49 ccw(c541.59,2344.42) 541.59,2368.57 ccw(c541.59,2392.71) v2@558.66,2375.64 ; v2@566.73,2115.57 cw(c566.73,2074.52) 595.75,2103.55 ; v2@573.73,2125.57 v2(911.73,1787.57) ; v2@901.73,1787.57 ccw(c877.59,1787.57) 894.66,1804.64 ccw(c911.73,1821.71) v2@911.73,1797.57
  Bottom Layer w20: v2(188.73,1722.57) 278.73,1722.57 305.43,1695.87 S4.2@402.56,1695.87 315,1695.87 ; S4.2@385.09,1429.91 402.56,1515.71 ; S4.2@385.09,1686.23 402.56,1600.43 ; S4.2@400.8,1678.4 315,1695.87 ; S4.2@400.8,1713.34 315,1695.87 ; S4.2@402.56,1420.27 S4.2@402.56,1694.57 ; S4.2@402.56,1428.15 402.56,1515.71 ; S4.2@402.56,1687.99 402.56,1600.43 ; S4.2@420.03,1429.91 402.56,1515.71 ; S4.2@420.03,1686.23 402.56,1600.43
MISO: DL4.A J7.1 R26.1 U1.16 | length 4484.6
  Top Layer w10: R26.1@761.73,2724.57 R26.1@761.73,2744.57
  Top Layer w20: J7.1@72.49,2473.57 38.49,2411.57 ; J7.1@100.49,2445.57 38.49,2411.57 ; v2(221.73,1672.44) 128.85,1672.44 38.49,1762.81 38.49,2411.57 ; U1.16@1146.47,1321.41 v2@1176.73,1284.57 ; U1.16@1146.47,1342.57 1146.47,1314.83 v2@1176.73,1284.57 ; 1161.13,1300.17 cw(c1135.52,1274.57) v2@1171.73,1274.57 ; 1164.25,1299.76 cw(c1138.18,1278.35) v2@1171.76,1275.05 ; v2(1176.73,1274.57) v2@1176.73,1284.57 ; 38.49,2411.57 J7.1@88.49,2461.57 38.49,2411.57
  Top Layer w25: R26.1@759.72,2722.56 759.72,2721.57 DL4.A@759.72,2550.2 R26.1@759.72,2722.56 ; R26.1@759.72,2722.56 760.23,2723.07 761.73,2724.57 R26.1@759.72,2722.56 ; 759.72,2619.01 761.73,2719.07 759.72,2619.02
  Bottom Layer w10: J7.1@63.64,2464.29 81.73,2514.57 ; J7.1@73.49,2461.78 81.73,2514.57 ; J7.1@102.95,2465.53 81.73,2514.57 ; J7.1@111.86,2470.44 81.73,2514.57 ; v2(221.73,1672.44) 268.85,1672.44 356.73,1584.57 356.73,1274.57 475.73,1155.57 1160.73,1155.57 1181.73,1176.57 1181.73,1269.57 v2(1176.73,1274.57) ; v2@228.8,1665.37 cw(c245.87,1648.3) 245.87,1672.44 cw(c245.87,1696.59) v2@228.8,1679.52 ; DL4.A@759.72,2550.2 702.09,2492.56 321.5,2492.56 287.49,2526.57 93.73,2526.57 81.73,2514.57 ; v2@1169.66,1267.49 cw(c1140.52,1238.35) 1181.73,1238.35 ; 81.73,2514.57 J7.1@88.49,2461.57 81.73,2468.32 81.73,2514.57
MOSI: J7.4 U1.15 U3.11 | length 2588.2
  Top Layer w10: v2@151.96,2163.36 cw(c145.83,2174.66) 136.73,2165.57 ; v2(156.73,2154.57) 147.73,2154.57 136.73,2165.57 ; J7.4@188.49,2361.57 136.73,2309.81 136.73,2165.57
  Top Layer w20: v2(339.73,2318.57) 366.73,2291.57 ; U3.11@398.49,2291.57 366.73,2291.57 ; U3.11@426.49,2291.57 366.73,2291.57 ; v2@1114.98,1250.32 U1.15@1114.98,1342.57 ; v2@1114.98,1251.57 U1.15@1114.98,1321.41
  Bottom Layer w10: v2@149.66,2147.49 cw(c132.59,2130.42) 156.73,2130.42 cw(c180.87,2130.42) v2@163.8,2147.49 ; v2(156.73,2154.57) 156.73,1840.57 212.73,1784.57 399.73,1784.57 489.73,1694.57 489.73,1315.57 598.73,1206.57 1038.85,1206.57 1047.85,1215.57 1111.73,1215.57 1115.73,1219.57 v2(1115.73,1249.57) ; v2@1108.66,1242.49 cw(c1091.59,1225.42) 1115.73,1225.42 cw(c1139.87,1225.42) v2@1122.8,1242.49
  Bottom Layer w20: J7.4@188.49,2361.57 296.73,2361.57 v2(339.73,2318.57)
NetC1_1: C1.1 C2.1 C6.1 D1.K U2.1 | length 2352.6
  Top Layer w40: 1921.73,1469.57 2009.37,1557.2 ; U2.1@2084.86,1557.2 2009.37,1557.2 ; U2.1@2118.58,1557.2 2009.37,1557.2
  Top Layer w80: C1.1@1856.73,1229.57 C2.1@1859.23,1349.57 ; 1921.73,1469.57 1866.73,1414.57 ; C6.1@1966.73,979.57 1866.73,1079.57 ; C6.1@1984.49,979.57 1866.73,1079.57 ; C2.1@1859.23,1349.57 C1.1@1866.73,1209.57 ; C2.1@1859.23,1349.57 1866.73,1414.57 ; C2.1@1859.23,1349.57 1866.73,1414.57 ; 1866.73,1079.57 1859.23,1229.57 1866.73,1414.57 ; 1866.73,1079.57 C1.1@1866.73,1209.57 ; C1.1@1866.73,1209.57 1866.73,1414.57
  Top Layer w100: C6.1@1966.73,979.57 C6.1@2031.73,979.57 2161.73,849.57 D1.K@2161.73,489.57
NetC3_2: C3.2 R3.2 U1.7 Y1.2 | length 3065.3
  Top Layer w10: R3.2@536.73,1509.57 536.73,1534.57
  Top Layer w12: R3.2@523.22,1519.8 556.73,1554.57 ; R3.2@532.91,1512.57 556.73,1554.57 ; 536.73,1534.57 556.73,1554.57 ; R3.2@539.23,1509.57 556.73,1554.57 ; R3.2@545.92,1507.51 556.73,1554.57 ; R3.2@557.95,1506.3 556.73,1554.57 ; 792.49,1440.59 U1.7@838.33,1440.59 ; U1.7@859.49,1440.59 789.63,1440.59 675.65,1554.57 556.73,1554.57
  Top Layer w20: C3.2@431.79,1205.89 446.73,1289.57 C3.2@461.67,1205.89 ; C3.2@446.73,1204.57 446.73,1341.57 ; Y1.2@477.49,1368.36 536.73,1461.52 ; Y1.2@495.34,1359.18 536.73,1461.52 ; Y1.2@496.49,1319.72 454.73,1349.57 ; Y1.2@496.49,1379.41 454.73,1349.57 ; Y1.2@504.8,1338.3 454.73,1349.57 ; Y1.2@504.8,1360.84 454.73,1349.57 ; Y1.2@506.05,1349.57 454.73,1349.57 ; Y1.2@517.09,1352.88 536.73,1461.52 ; R3.2@521.79,1508.24 536.73,1424.57 R3.2@551.67,1508.24 ; R3.2@536.73,1509.57 536.73,1399.57 ; Y1.2@537.09,1351.12 536.73,1461.52 ; 454.73,1349.57 Y1.2@486.73,1349.57 ; Y1.2@486.67,1380.1 536.73,1399.57 ; Y1.2@486.67,1380.1 536.73,1399.57 ; Y1.2@486.67,1380.1 536.73,1399.57 ; Y1.2@486.73,1349.57 496.39,1359.23 536.73,1399.57 ; Y1.2@486.73,1349.57 536.73,1399.57 ; Y1.2@497.48,1362.89 536.73,1399.57 ; Y1.2@497.48,1362.89 536.73,1399.57 ; Y1.2@497.48,1362.89 536.73,1399.57 ; Y1.2@506.05,1355.47 536.73,1399.57 ; Y1.2@506.05,1355.47 536.73,1399.57 ; Y1.2@506.05,1355.47 536.73,1461.52 ; Y1.2@506.05,1355.47 536.73,1399.57 ; Y1.2@515.99,1350.01 536.73,1399.57 ; Y1.2@515.99,1350.01 536.73,1399.57 ; Y1.2@515.99,1350.01 536.73,1399.57 ; Y1.2@535.88,1345.86 536.73,1399.57 ; Y1.2@535.88,1345.86 536.73,1399.57 ; Y1.2@535.88,1345.86 536.73,1399.57
NetC4_2: C4.2 R3.1 U1.8 Y1.1 | length 2923.3
  Top Layer w20: R3.1@611.83,1507.86 626.73,1443.57 ; R3.1@626.73,1509.57 626.73,1443.57 ; Y1.1@641.57,1345.91 626.73,1443.57 ; R3.1@641.63,1507.86 626.73,1443.57 ; Y1.1@641.73,1333.61 689.49,1241.38 ; Y1.1@660.37,1341.08 689.49,1241.38 ; Y1.1@661.02,1350.93 626.73,1443.57 ; Y1.1@661.73,1385.28 771.69,1404.52 ; Y1.1@666.95,1365.9 771.69,1404.52 ; Y1.1@671.41,1343.66 689.49,1241.38 ; C4.2@674.55,1205.4 689.49,1289.08 C4.2@704.43,1205.4 ; Y1.1@676.9,1345.55 771.69,1404.52 ; Y1.1@681.21,1361.17 626.73,1443.57 ; Y1.1@682.67,1345.02 689.49,1241.38 ; Y1.1@689,1329.53 771.69,1404.52 ; C4.2@689.49,1204.08 Y1.1@689.49,1380.81 ; Y1.1@696.76,1373.9 626.73,1443.57 ; Y1.1@702.74,1344.4 689.49,1241.38 ; U1.8@838.33,1409.09 776.26,1409.09 ; U1.8@859.49,1409.09 776.26,1409.09 ; 626.73,1443.57 671.41,1355.47 771.69,1404.52 ; 626.73,1443.57 Y1.1@689.49,1380.81 ; Y1.1@689.49,1380.81 689.49,1349.57 689.49,1346.81 713.98,1346.81 ; 713.98,1346.81 Y1.1@671.41,1349.57 713.98,1346.81 ; 713.98,1346.81 672.19,1338.25 713.98,1346.81 ; 713.98,1346.81 673.64,1360.68 713.98,1346.81 ; 713.98,1346.81 681.01,1319.74 713.98,1346.81 ; 713.98,1346.81 684.78,1377.91 713.98,1346.81 ; 713.98,1346.81 776.26,1409.09
NetC9_1: C9.1 FU1.1 L1.2 R1.1 | length 2185.2
  Top Layer w20: C9.1@1741.79,1860.89 1756.73,1944.57 C9.1@1771.67,1860.89 ; R1.1@1741.79,1968.24 1756.73,1884.57 ; R1.1@1742.16,1960.66 1711.73,2014.57 ; R1.1@1744.49,1966.82 C9.1@1767.88,1882.12 ; R1.1@1754.23,1969.57 1711.73,2014.57 ; C9.1@1756.73,1859.57 R1.1@1756.73,1969.57 ; R1.1@1759.23,1969.57 C9.1@1767.88,1882.12 ; R1.1@1763.81,1981.11 1711.73,2014.57 ; R1.1@1771.67,1968.24 1756.73,1884.57 ; R1.1@1774.23,1969.76 C9.1@1767.88,1882.12 ; FU1.1@1820.12,2404.65 1751.73,2419.57 ; FU1.1@1820.12,2434.48 1751.73,2419.57 ; 1711.73,2014.57 R1.1@1756.73,1969.57 ; 1711.73,2014.57 1711.73,2379.57 1751.73,2419.57 ; 1751.73,2419.57 FU1.1@1821.73,2419.57 1751.73,2419.57 ; 1756.73,1884.57 R1.1@1756.73,1969.57
  Top Layer w40: FU1.1@1821.73,2419.57 1941.73,2419.57 ; L1.2@2042.2,2317.36 1941.73,2419.57 ; L1.2@2071.73,2317.36 2043.94,2317.36 1941.73,2419.57
NetC9_2: C9.2 R1.2 R2.2 U2.4 | length 2038.7
  Top Layer w20: R1.2@1829.23,1969.76 C9.2@1835.58,1882.12 ; C9.2@1831.79,1860.89 1846.73,1944.57 C9.2@1861.67,1860.89 ; R1.2@1831.79,1968.24 1846.73,1884.57 ; R1.2@1844.23,1969.57 C9.2@1835.58,1882.12 ; C9.2@1849.23,1859.57 1934.23,1859.57 ; C9.2@1850.56,1844.62 1934.23,1859.57 ; C9.2@1850.56,1874.51 1934.23,1859.57 ; R1.2@1858.98,1966.82 C9.2@1835.58,1882.12 ; R1.2@1861.67,1968.24 1846.73,1884.57 ; R2.2@1961.79,1888.24 1976.73,1804.57 ; R2.2@1991.67,1888.24 1976.73,1804.57 ; U2.4@2084.86,1710.75 2030.55,1710.75 ; U2.4@2118.58,1710.75 2030.55,1710.75 ; 1846.73,1884.57 R1.2@1846.73,1969.57 C9.2@1846.73,1859.57 1946.73,1859.57 ; 1946.73,1859.57 1974.23,1889.57 1946.73,1859.57 ; 1946.73,1859.57 1961.5,1897.49 1946.73,1859.57 ; 1946.73,1859.57 1983.23,1877.57 1946.73,1859.57 ; 1946.73,1859.57 R2.2@1976.73,1889.57 ; 1976.73,1804.57 R2.2@1976.73,1889.57 ; R2.2@1976.73,1889.57 1976.73,1764.57 2030.55,1710.75
NetC11_1: C11.1 U1.20 | length 449.1
  Top Layer w15: U1.20@1214.49,1503.58 1249.47,1503.58 ; C11.1@1360.63,1302.44 1321.73,1319.57 ; C11.1@1360.63,1336.69 1321.73,1319.57 ; C11.1@1364.23,1319.57 1321.73,1319.57 ; C11.1@1366.73,1319.57 1321.73,1319.57 ; 1249.47,1503.58 1235.65,1503.58 1249.47,1503.58 ; 1249.47,1503.58 1311.73,1441.32 1311.73,1329.57 1321.73,1319.57
NetC12_2: C12.2 R13.1 U1.18 | length 903.8
  Top Layer w10: R13.1@1216.73,1185.42 R13.1@1216.73,1189.57
  Top Layer w15: U1.18@1214.49,1440.59 1270.71,1440.59 ; R13.1@1216.73,1189.57 1281.73,1189.57 ; R13.1@1219.23,1189.57 1281.73,1189.57 ; R13.1@1221.68,1172.24 1281.73,1189.57 ; R13.1@1221.68,1206.89 1281.73,1189.57 ; U1.18@1235.65,1440.59 1270.71,1440.59 ; C12.2@1365.71,1172.2 1297.9,1189.57 ; C12.2@1365.71,1206.93 1297.9,1189.57 ; C12.2@1367.9,1189.57 1297.9,1189.57 ; C12.2@1370.4,1189.57 1281.73,1189.57 ; 1270.71,1440.59 1281.73,1429.57 1281.73,1319.99 1283.7,1318.03 1283.7,1191.53 1281.73,1189.57
NetD2_K: D2.K L1.1 U2.2 | length 1710.6
  Top Layer w40: L1.1@2051.73,2038.77 2152.53,2038.77 ; U2.2@2118.58,1608.38 2190.55,1608.38 ; U2.2@2152.3,1608.38 2190.55,1608.38 ; 2152.53,2038.77 2101.26,2041.77 2152.53,2038.77 ; 2152.53,2038.77 2231.73,1959.57 2231.73,1649.57 2190.55,1608.38
  Top Layer w50: D2.K@1831.73,2089.57 2000.94,2089.57 ; D2.K@1844.87,2089.57 L1.1@2042.2,2041.77 ; L1.1@2027.22,2045.4 1844.23,2094.57 2000.94,2089.57 ; L1.1@2051.73,2038.77 2000.94,2089.57 ; 2000.94,2089.57 L1.1@2042.2,2041.77 ; 2000.94,2089.57 L1.1@2042.2,2041.77
NetDL1_A: DL1.A R20.1 | length 750.7
  Top Layer w25: R20.1@1286.73,2809.57 v2(1551.73,2809.57) ; R20.1@1289.23,2809.57 1389.23,2809.57
  Bottom Layer w10: v2(1551.73,2809.57) 1601.73,2809.57 1641.73,2769.57 DL1.A@1641.73,2562.13 ; v2@1558.8,2802.49 cw(c1575.87,2785.42) 1575.87,2809.57 cw(c1575.87,2833.71) v2@1558.8,2816.64 ; DL1.A@1641.73,2562.13 1631.77,2552.16 1629.8,2550.2 DL1.A@1641.73,2562.13
NetDL2_A: DL2.A R24.1 | length 336.3
  Top Layer w10: R24.1@1286.73,2699.57 R24.1@1286.73,2709.57
  Top Layer w25: R24.1@1286.73,2699.57 1326.73,2699.57 ; DL2.A@1342.4,2550.2 1342.4,2683.9 ; R24.1@1289.23,2699.57 1326.73,2699.57 ; R24.1@1289.23,2699.57 1326.73,2699.57 ; R24.1@1289.23,2699.57 1342.4,2683.9 ; 1326.73,2699.57 1342.4,2683.9
NetDS1_a: DS1.a RN1.8 | length 859.1
  Top Layer w15: RN1.8@951.73,1962.08 999.22,1962.08 ; RN1.8@961.89,1962.08 999.22,1962.08 ; 1027.57,1954.07 cw(c1027.57,1927.4) v2@1046.43,1946.26 ; v2(1051.73,1951.57) 1049.22,1954.07 1007.22,1954.07 999.22,1962.08
  Top Layer w20: DS1.a@1269.61,2287.34 1289.49,2199.57 DS1.a@1309.36,2287.34 ; v2@1284.2,2098.1 ccw(c1271.42,2110.88) 1289.49,2110.88 ; v2@1289.49,2094.57 DS1.a@1289.49,2289.57
  Bottom Layer w20: v2@1053.73,1953.57 1146.73,1953.57 v2(1287.73,2094.57) ; v2@1055.27,1948.03 cw(c1068.63,1934.67) 1068.63,1953.57
NetDS1_b: DS1.b RN1.6 | length 1085.2
  Top Layer w10: DS1.b@871.14,2272.58 918.73,2239.57 ; DS1.b@877.63,2280.38 918.73,2239.57 ; DS1.b@896.73,2282.32 DS1.b@889.49,2289.57 ; DS1.b@903.31,2295.4 918.73,2239.57 ; DS1.b@913.28,2297.23 918.73,2239.57 ; 1100.05,2222.24 cw(c1057.38,2179.57) v2@1117.73,2179.57 ; 1117.13,2205.17 cw(c1091.52,2179.57) v2(1127.73,2179.57) 1127.73,2194.57 1082.73,2239.57 918.73,2239.57 ; DS1.b@889.49,2289.57 918.73,2239.57 ; DS1.b@889.49,2289.57 889.49,2268.81 918.73,2239.57
  Top Layer w15: RN1.6@951.73,1993.57 1020.72,1993.57 v2(1023.73,1990.57) ; RN1.6@961.89,1993.57 v2@1016.73,1993.57 ; 998.36,1993.57 cw(c998.36,1965.2) 1018.43,1985.26 ccw(c998.36,1965.2) 998.36,1993.57
  Bottom Layer w20: v2(1023.73,1990.57) 1023.73,2034.57 1127.73,2138.57 v2(1127.73,2179.57)
NetDS1_c: DS1.c RN1.4 | length 309.2
  Top Layer w15: RN1.4@951.73,2025.07 1057.23,2025.07 1089.49,1992.81 DS1.c@1089.49,1889.57 ; RN1.4@961.89,2025.07 1016.73,2025.07
NetDS1_com1: DS1.com1 Q1.3 | length 207
  Top Layer w20: DS1.com1@1378.79,2306.47 1421.73,2321.81 ; DS1.com1@1389.49,2289.57 1421.73,2321.81 ; DS1.com1@1406.39,2278.87 1421.73,2321.81 ; Q1.3@1421.73,2391.97 1421.73,2321.81
NetDS1_com2: DS1.com2 Q2.3 | length 168.4
  Top Layer w20: Q2.3@991.73,2396.97 991.73,2359.57 1011.73,2339.57 1046.73,2339.57 1089.49,2296.81 DS1.com2@1089.49,2289.57
NetDS1_com3: DS1.com3 Q3.3 | length 720
  Top Layer w20: v2(821.73,2336.57) 821.73,2368.07
  Top Layer w25: 821.73,2376.97 815.51,2396.97 821.73,2376.97 ; 821.73,2376.97 Q3.3@801.73,2396.97 v2(821.73,2336.57) 821.73,2376.97
  Bottom Layer w20: v2(821.73,2336.57) 821.73,2228.57 848.73,2201.57 954.73,2201.57 989.49,2236.32 ; DS1.com3@969.84,2285.81 989.49,2236.32 ; DS1.com3@1009.13,2285.81 989.49,2236.32 ; 989.49,2236.32 DS1.com3@989.49,2289.57 989.49,2236.32